# Altium PCB modFOC-MCU.PcbDoc (part 2 of 2)
Units mm, origin at the board's own origin, x right, y up, seen from the top; angles counter-clockwise.
Board outline 45 x 45 mm, 4 copper layers (Top Layer, Mid Layer 1, Mid Layer 2, Bottom Layer), stack 1.531 mm thick; 54 components, 57 nets, 316 pads, 159 vias.
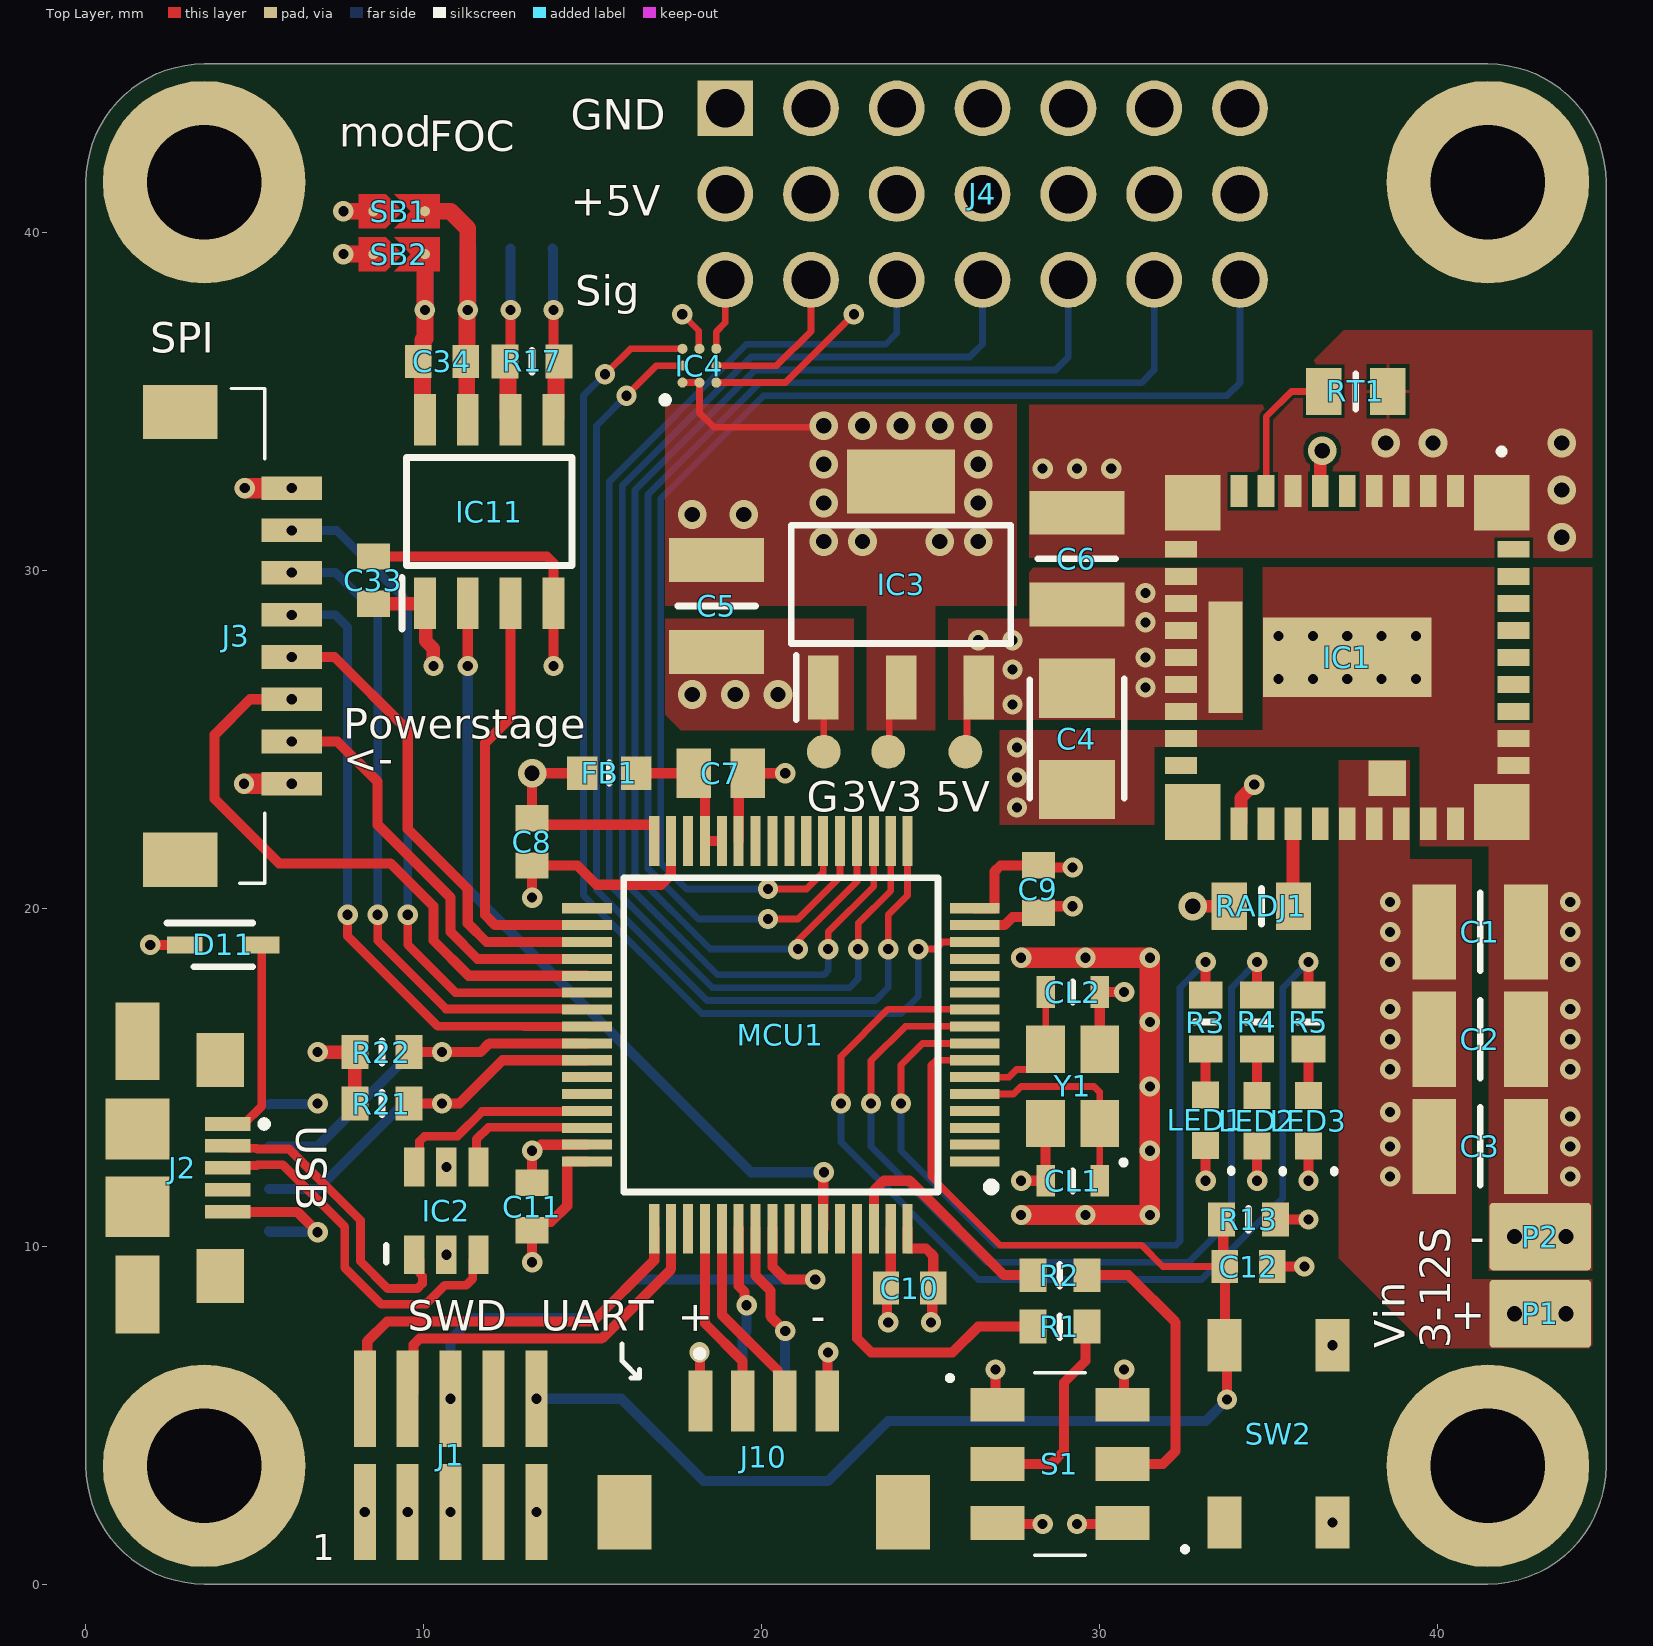
[diagram p0: Top Layer view]

## Silkscreen, mask and mechanical layers (free items; w line width, h text height) (continued)
Bottom Overlay: (continued)
  text "-" at 22.253,8.377 h0.9 r180
  text "+" at 18.443,8.331 h0.9 r180
  text "+" at 41.427,7.544 h0.9
Board Shape:
  the board outline again, w0.254

## Text inside footprints (layer, text, board x,y; h text height)
J1: Top Overlay "1" at 6.706,0.711 h0.76